# Altium PCB RadioPod.PcbDoc
Units mm, origin at the board's own origin, x right, y up, seen from the top; angles counter-clockwise.
Board outline 50 x 50 mm, 2 copper layers (Component Side, Bottom Layer), stack 0.325 mm thick; 14 components, 6 nets, 97 pads, 0 vias.
Unrouted connection lines stored in the file: 14.
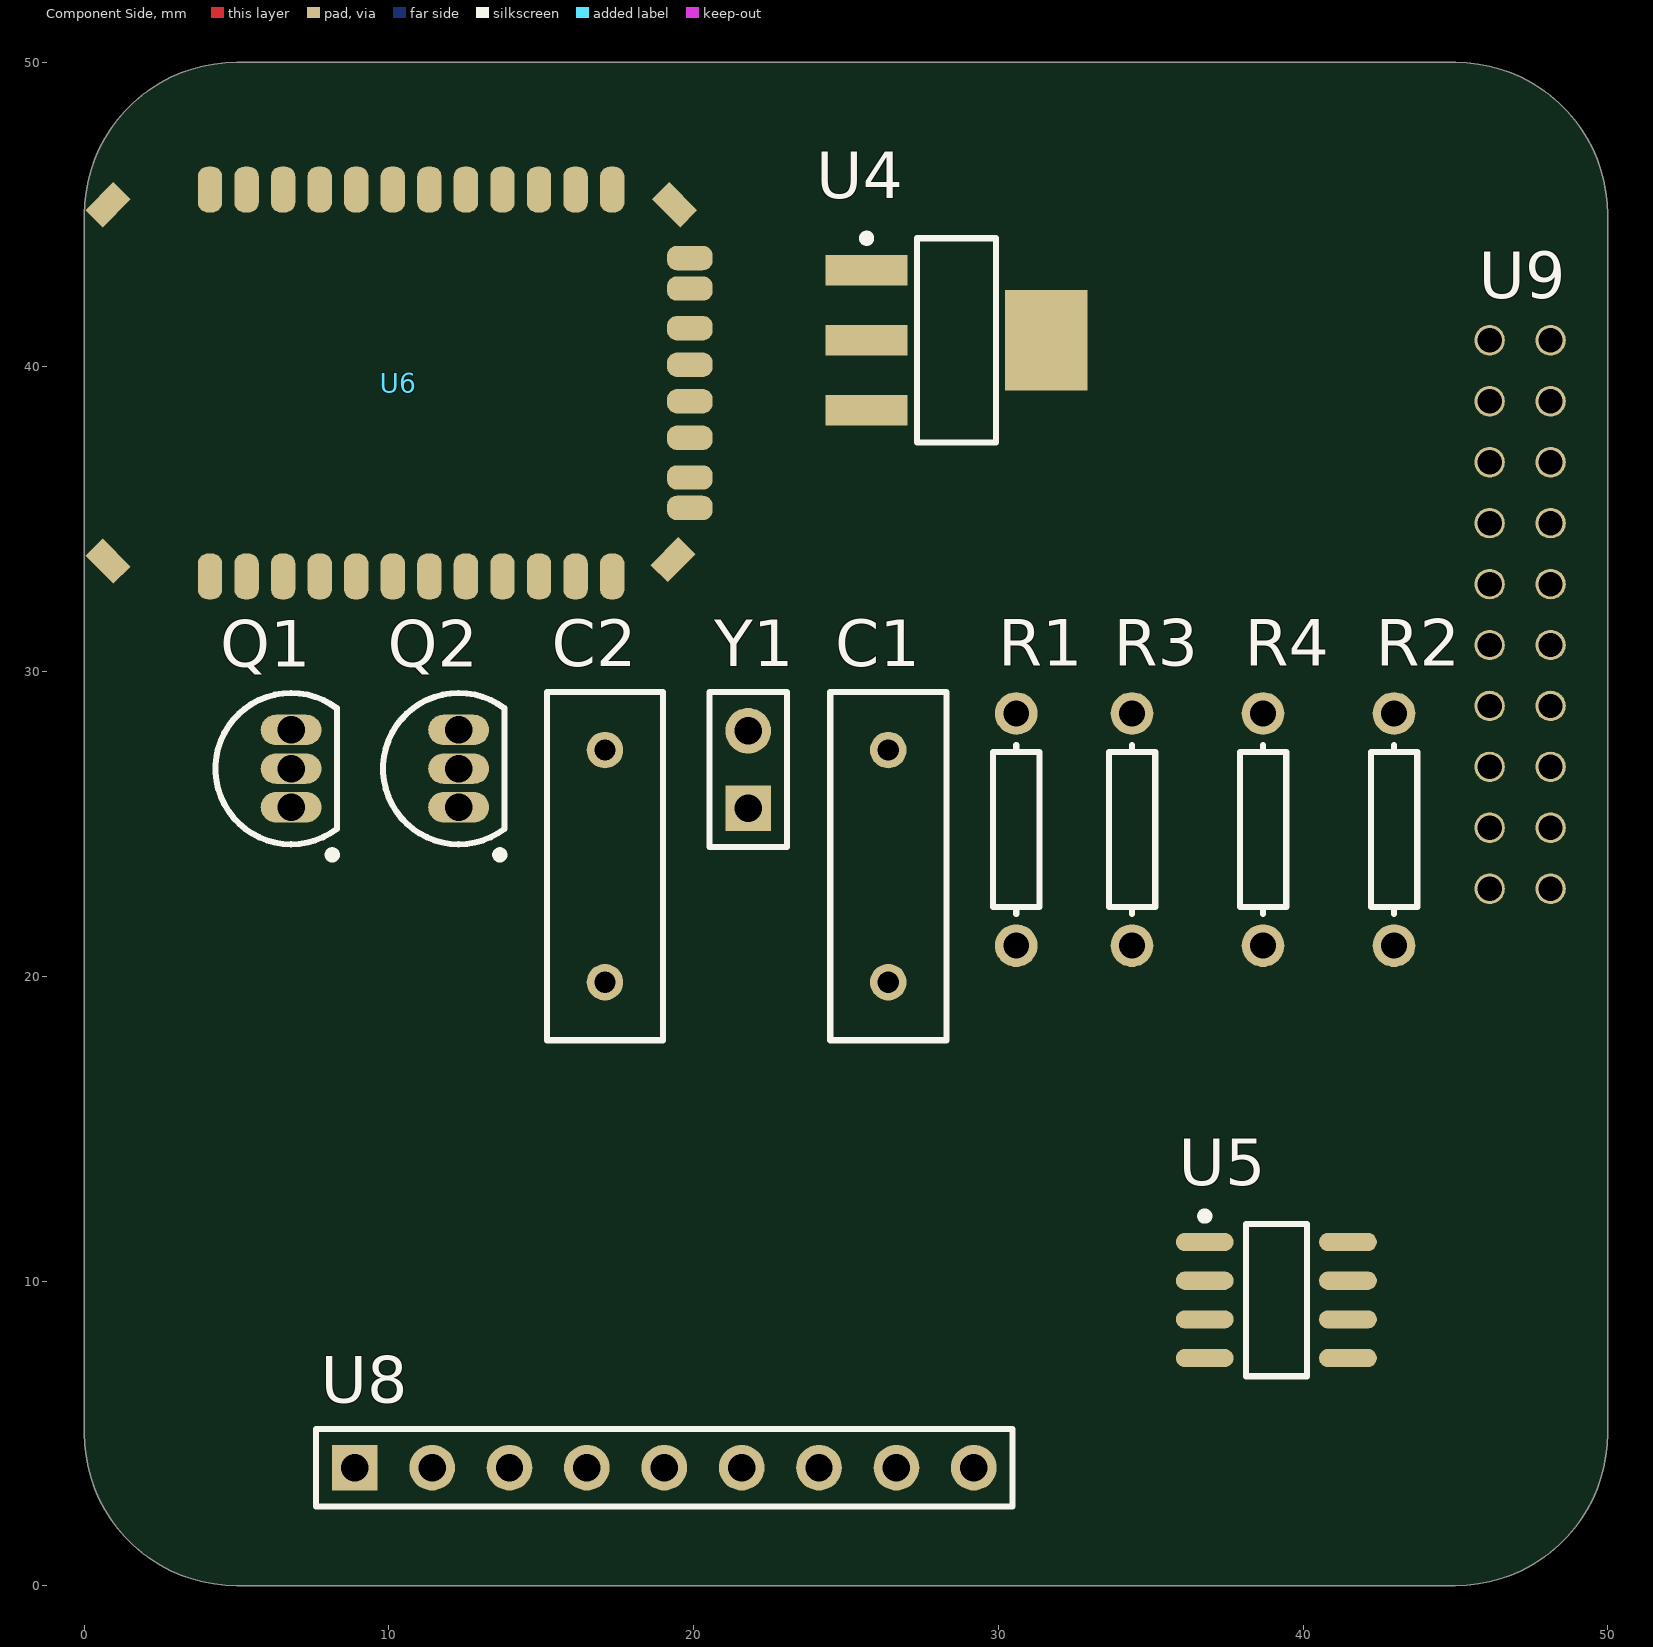
[diagram p0: Component Side view]
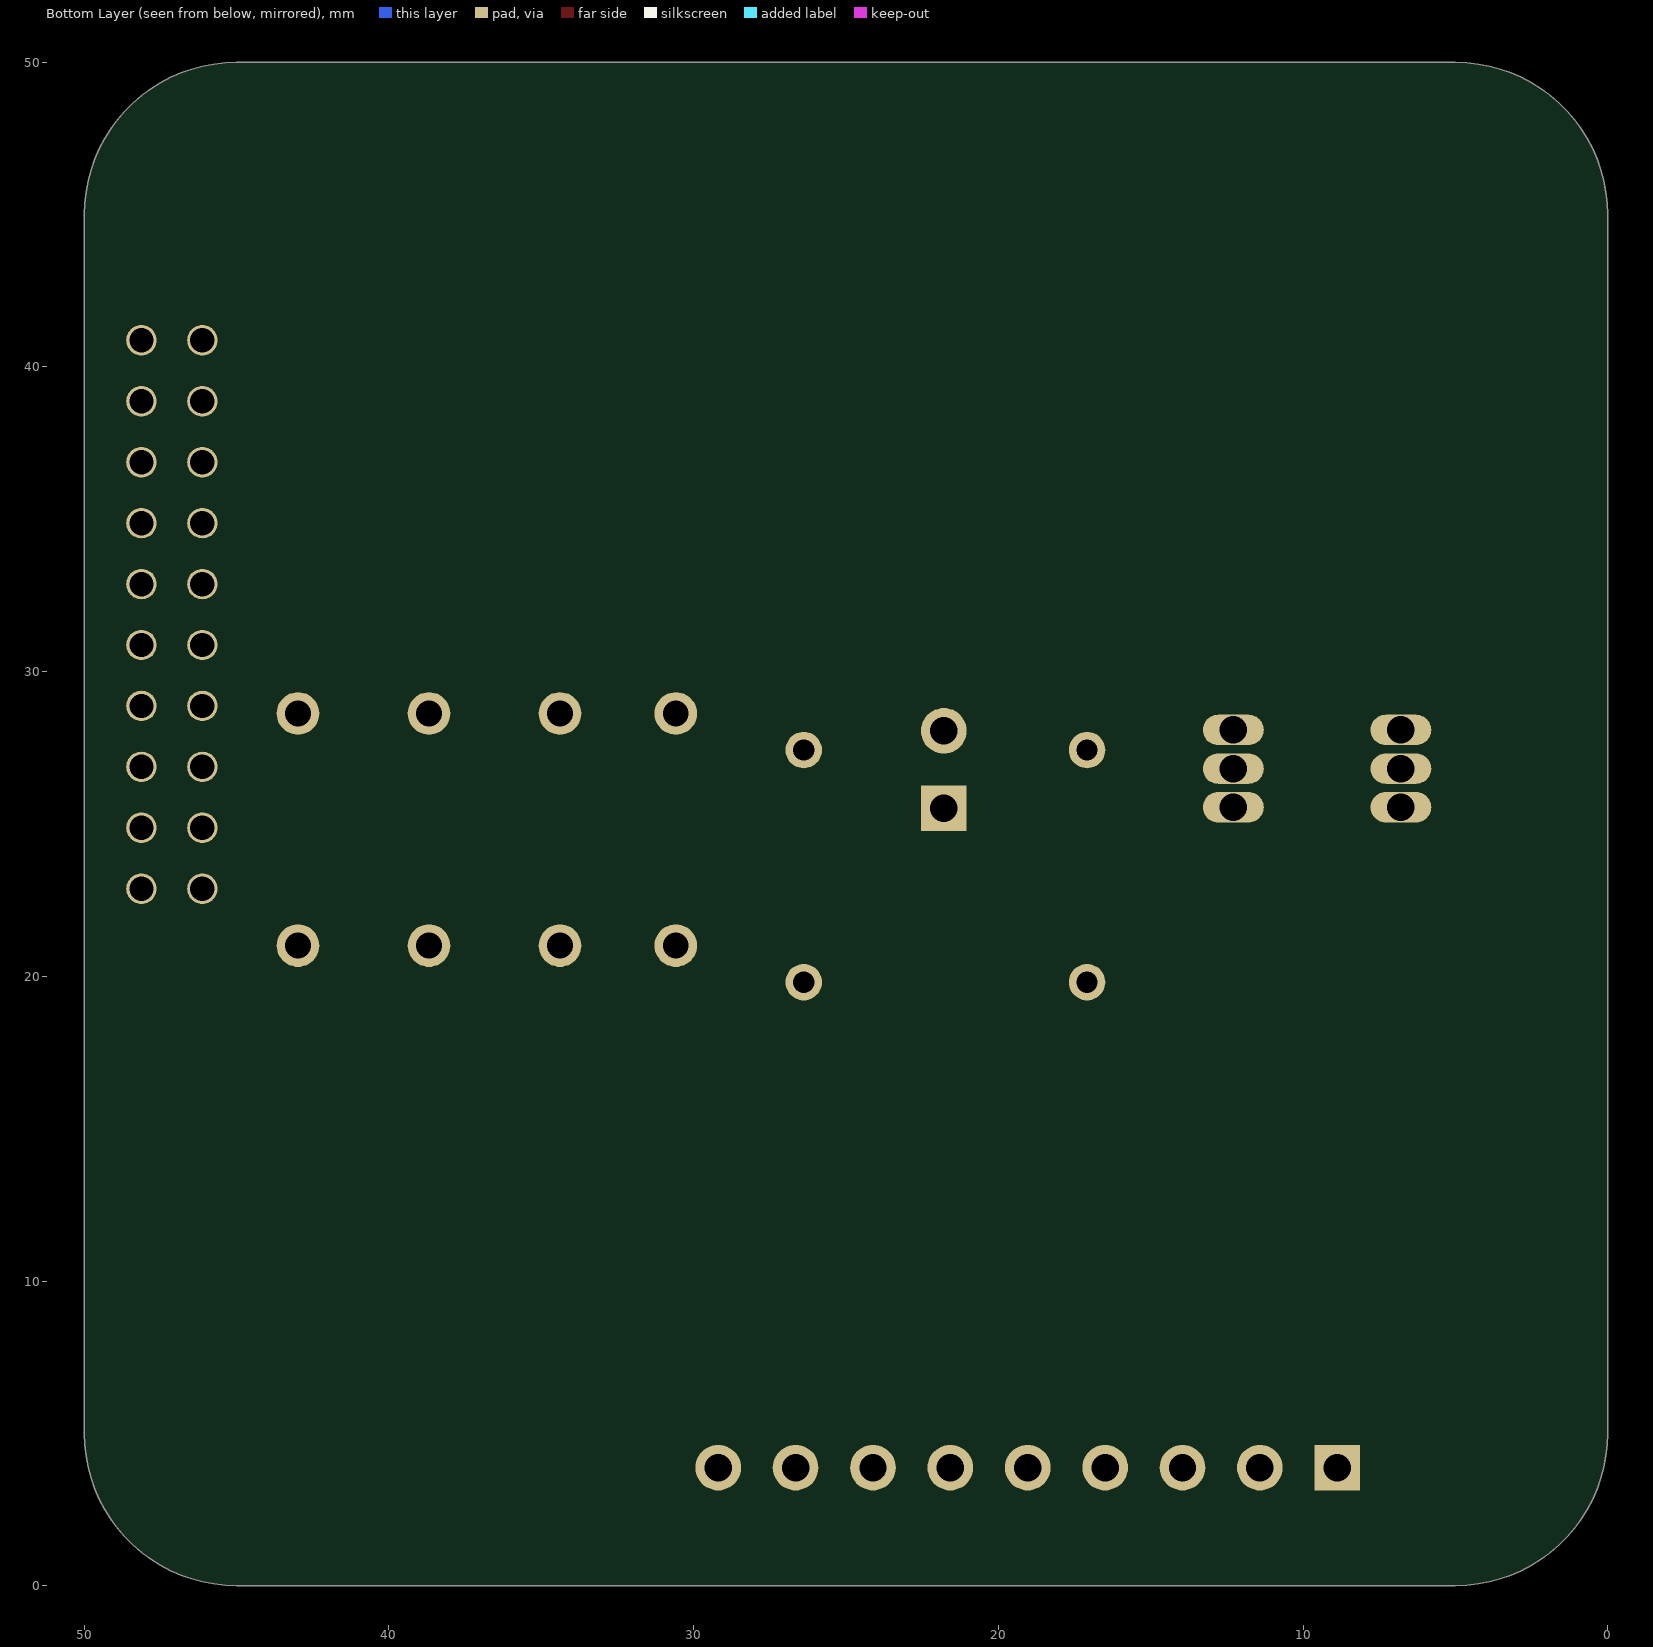
[diagram p1: Bottom Layer view, seen from below]

## Layer stack, top to bottom
Top Solder: solder mask 0.0102, Solder Resist, Dk 3.5
Component Side: signal copper 0.0356
Dielectric 1: core 0.254, FR-4, Dk 4.2
Bottom Layer: signal copper 0.0356
Solder Side: solder mask 0.0102, Solder Resist, Dk 3.5

## Board outline
0,5 0,45 cw(c5,45) 5,50 45,50 cw(c45,45) 50,45 50,5 cw(c45,5) 45,0 5,0 cw(c5,5)

## Design rules (kind name [scope] priority, off if disabled: settings)
Clearance [All] p1: gap=0.254
FabricationTestPointUsage TestPointUsage [All] p1: valid=0 allowmultiple=FALSE
FabricationTestpoint Testpoint [All] p1: side=3 testpointundercomponent=TRUE minsize=1.016 maxsize=2.54 preferedsize=1.524 minholesize=0 maxholesize=1.016 preferedholesize=0.813 testpointgrid=0.025 allowsidetop=TRUE allowsidebottom=TRUE usegrid=TRUE gridtolerance=0
PolygonConnect [All] p1: connectstyle=Relief reliefconductorwidth=0.254 reliefentries=4 polygonreliefangle="90 Angle" airgapwidth=0.254
RoutingVias [All] p1: holewidth=0.711 width=1.27 viastyle="Through Hole" minholewidth=0.711 minwidth=1.27 maxholewidth=0.711 maxwidth=1.27
SilkToSolderMaskClearance SilkscreenOverComponentPads [IsPad] p1: minsilkscreentomaskgap=0.254 clearancetoexposedcopper=TRUE
SolderMaskExpansion [All] p1: expansion=0.102
Width [All] p1: maxlimit=0.254 minlimit=0.254 preferedwidth=0.254
27 further rules are at their usual default settings.

## Components (designator, comment, footprint, x,y, rotation, side; value= is the part's Value field where it differs from the comment)
C1 "Cap" RAD-0.3 26.388,23.618 r90 top
C2 "Cap" RAD-0.3 17.088,23.618 r90 top
Q1 "2N3904" TO-92A 6.788,26.818 r0 top
Q2 "2N3904" TO-92A 12.288,26.818 r0 top
R1 "Res1" AXIAL-0.3 30.588,24.818 r90 top
R2 "Res1" AXIAL-0.3 42.988,24.818 r90 top
R3 "Res1" AXIAL-0.3 34.388,24.818 r90 top
R4 "Res1" AXIAL-0.3 38.688,24.818 r90 top
U4 "Comment" SOT223_M 28.625,40.875 r0 top
U5 "Comment" SO8_L 39.125,9.375 r0 top
U6 "Comment" RN41 20.125,32.875 r90 top
U8 "Comment" HDR1X9 8.875,3.875 r0 top
U9 "Comment" "9XTend Header" 45.625,22.375 r0 top
Y1 "Header 2" HDR1X2 21.788,25.518 r90 top

## Footprints (in the part's own frame and the unit in brackets; to place one, negate y for a bottom-side part, rotate by r counter-clockwise, add the part's x,y. Pads: shape width x height; smd on the part's side, far side on the other; paste and mask are expansions set on the pad)
"9XTend Header" [mm]
  round 1 hole 0.8: A1(0.5,18.5) A2(0.5,16.5) A3(0.5,14.5) A4(0.5,12.5) A5(0.5,10.5) A6(0.5,8.5) A7(0.5,6.5) A8(0.5,4.5) A9(0.5,2.5) A10(0.5,0.5) A11(2.5,0.5) A12(2.5,2.5) A13(2.5,4.5) A14(2.5,6.5) A15(2.5,8.5) A16(2.5,10.5) A17(2.5,12.5) A18(2.5,14.5) A19(2.5,16.5) A20(2.5,18.5)
AXIAL-0.3 [mm] "Axial Device, Thru-Hole; 2 Leads; 0.3 in Pin Spacing"
  round 1.4 hole 0.85: 1(-3.81,0) 2(3.81,0)
  silkscreen extent -2.77,-0.76 2.77,0.76
HDR1X2 [mm] "Connector; Header; 2 Position"
  rect 1.5x1.5 hole 0.9: 1(0,0)
  round 1.5 hole 0.9: 2(2.54,0)
  silkscreen extent -1.27,-1.27 3.81,1.27
HDR1X9 [mm] "Connector; Header; 9 Position"
  rect 1.5x1.5 hole 0.9: 1(0,0)
  round 1.5 hole 0.9: 2(2.54,0) 3(5.08,0) 4(7.62,0) 5(10.16,0) 6(12.7,0) 7(15.24,0) 8(17.78,0) 9(20.32,0)
  silkscreen extent -1.27,-1.27 21.59,1.27
RAD-0.3 [mm] "Radial Cap, Thru-Hole; 2 Leads; 0.3 in Pin Spacing"
  round 1.2 hole 0.7: 1(-3.81,0) 2(3.81,0)
  silkscreen extent -5.71,-1.91 5.71,1.91
RN41 [mm]
  rrect80% 1.5x0.8 smd: A1(0.25,16) A2(0.25,14.8) A3(0.25,13.6) A4(0.25,12.4) A5(0.25,11.2) A6(0.25,10) A7(0.25,8.8) A8(0.25,7.6) A9(0.25,6.4) A10(0.25,5.2) A11(0.25,4) A12(0.25,2.8) A21(12.95,2.8) A22(12.95,4) A23(12.95,5.2) A24(12.95,6.4) A25(12.95,7.6) A26(12.95,8.8) A27(12.95,10) A28(12.95,11.2) A29(12.95,12.4) A30(12.95,13.6) A31(12.95,14.8) A32(12.95,16)
  rrect80% 0.8x1.5 smd: A13(2.5,0.25) A14(3.5,0.25) A15(4.8,0.25) A16(6,0.25) A17(7.2,0.25) A18(8.4,0.25) A19(9.7,0.25) A20(10.7,0.25)
  rect 0.8x1.3 smd rot 135: SH1(0.75,19.35) SH3(12.45,0.75)
  rect 0.8x1.3 smd rot 45: SH2(0.8,0.8) SH4(12.45,19.35)
  body extent 1,1 12.2,25.8, height 1
SO8_L [mm] "SOIC, 8-Leads, Body 4.9x3.9mm, Pitch 1.27mm, IPC High Density"
  oval 1.9x0.6 smd: 1(-2.35,1.905) 2(-2.35,0.635) 3(-2.35,-0.635) 4(-2.35,-1.905) 5(2.35,-1.905) 6(2.35,-0.635) 7(2.35,0.635) 8(2.35,1.905)
  silkscreen extent -2.47,-2.5 1,2.88, body extent -2,-2.5 2,2.5, height 1.75
SOT223_M [mm] "SOT223, 4-Leads, Body 6.5x3.5mm, Pitch 2.3mm, Lead Span 7mm, IPC Low Density"
  rect 2.7x1 smd: 1(-2.95,2.3) 2(-2.95,0) 3(-2.95,-2.3)
  rect 2.7x3.3 smd: 4(2.95,0)
  silkscreen extent -3.07,-3.35 1.3,3.47, body extent -1.85,-3.35 1.85,3.35, height 1.7
TO-92A [mm] "TO, Flat Index; 3 In-Line, Axial Leads; Body Dia. 4.5mm; Leads 0.51 x 0.48 mm (max)"
  oval 2x1 hole 0.9: 1(0,-1.27) 2(0,0) 3(0,1.27)
  silkscreen extent -2.48,-2.95 1.5,2.48, body extent -2.5,-2.5 1.5,2.5, height 6.86

## Part data
C1 C2: "Capacitor"
Q1 Q2: "NPN General Purpose Amplifier"
R1 R2 R3 R4: "Resistor"
Y1: "Header, 2-Pin"

## Nets (pads, with @x,y where several pads share a name; then routed paths per layer and width w, separated by ;. In a path a pad name is that pad's centre, name@x,y a point inside that pad or via, vN(x,y) a via of type N, cw(c..) or ccw(c..) an arc to the next point about the centre after c; other vN are vias at no path point)
12V: R1.2 R2.1 R3.1 R4.1 Y1.2
GND: Q1.1 Q2.1 Y1.1
NetC1_1: C1.1 Q1.3 R3.2
NetC1_2: C1.2 Q2.2 R2.2
NetC2_1: C2.1 Q1.2 R1.1
NetC2_2: C2.2 Q2.3 R4.2
pads on no net: U4.1 U4.2 U4.3 U4.4 U5.1 U5.2 U5.3 U5.4 U5.5 U5.6 U5.7 U5.8 U6.A1 U6.A2 U6.A3 U6.A4 U6.A5 U6.A6 U6.A7 U6.A8 U6.A9 U6.A10 U6.A11 U6.A12 U6.A13 U6.A14 U6.A15 U6.A16 U6.A17 U6.A18 U6.A19 U6.A20 U6.A21 U6.A22 U6.A23 U6.A24 U6.A25 U6.A26 U6.A27 U6.A28 U6.A29 U6.A30 U6.A31 U6.A32 U6.SH1 U6.SH2 U6.SH3 U6.SH4 U8.1 U8.2 U8.3 U8.4 U8.5 U8.6 U8.7 U8.8 U8.9 U9.A1 U9.A2 U9.A3 U9.A4 U9.A5 U9.A6 U9.A7 U9.A8 U9.A9 U9.A10 U9.A11 U9.A12 U9.A13 U9.A14 U9.A15 U9.A16 U9.A17 U9.A18 U9.A19 U9.A20

## Silkscreen, mask and mechanical layers (free items; w line width, h text height)
Mechanical 1:
  the board outline again, w0.254
Mechanical 16:
  drawing of 1874 lines, arcs and shapes, not listed
  text "1" at -29.286,135.509 h1.78
  text "2" at 43.358,135.509 h1.78
  text "3" at 116.51,135.509 h1.78
  text "4" at 189.408,135.509 h1.78
  text "A" at -63.627,112.497 h1.78
  text "A" at 223.393,112.497 h1.78
  text "B" at -63.627,64.44 h1.78
  text "B" at 223.393,64.44 h1.78
  text "C" at -63.627,15.926 h1.78
  text "C" at 223.393,15.926 h1.78
  text "ENGINEER:" at 108.458,-21.082 h1.14
  text "TITLE:" at 146.558,-21.082 h1.14
  text "PCB DESIGNER:" at 108.458,-28.575 h1.14
  text "D" at -63.627,-32.08 h1.78
  text "D" at 223.393,-32.08 h1.78
  text "DATE:" at 108.458,-36.322 h1.14
  text "PART NO.:" at 146.558,-36.322 h1.14
  text "REV:" at 199.898,-36.322 h1.14
  text "Altium Limited" at 75.438,-38.862 h1.78
  text ".PRINT_DATE" at 109.728,-39.37 h1.78
  text "12a Rodborough Rd" at 75.438,-41.402 h1.78
  text "Frenchs Forest" at 75.438,-43.942 h1.78
  text "FILE NAME:" at 108.458,-43.942 h1.14
  text "DWG NO:" at 146.558,-43.942 h1.14
  text "SCALE:" at 199.898,-43.942 h1.14
  text "NSW 2086" at 75.438,-46.482 h1.78
  text ".PCB_FILE_NAME_NO_PATH" at 109.728,-46.99 h1.78
  text "1" at -29.286,-52.451 h1.78
  text "2" at 43.358,-52.451 h1.78
  text "3" at 116.51,-52.451 h1.78
  text "4" at 189.408,-52.451 h1.78